# EAGLE board switchboard (EAGLE 6.4)
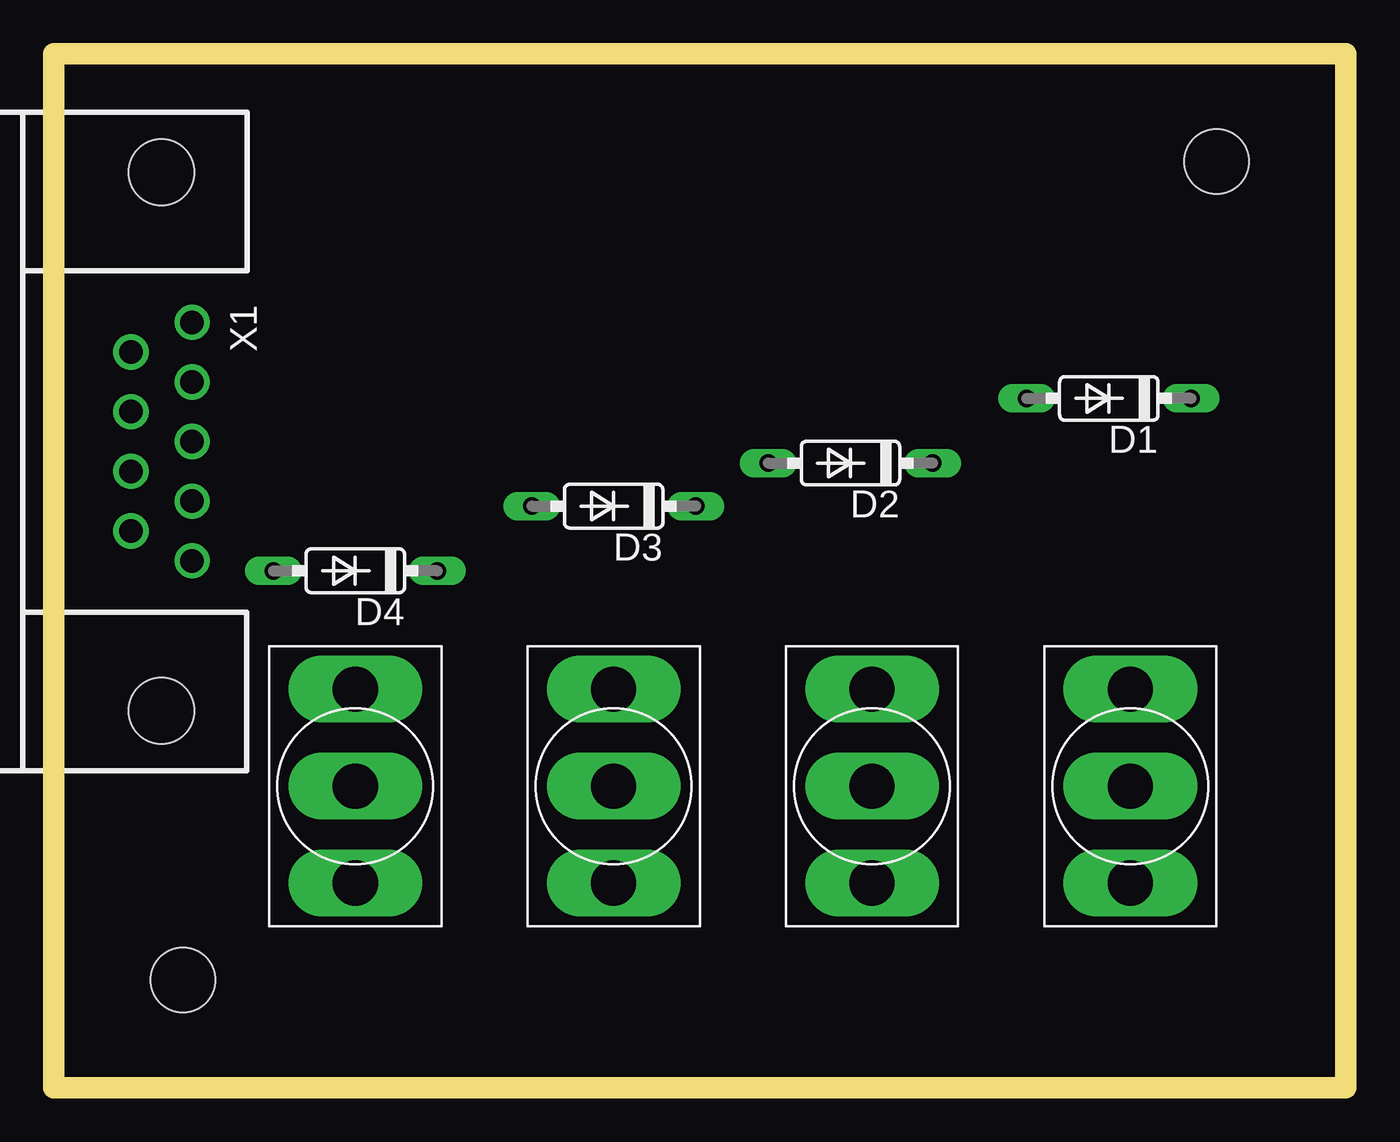
[diagram p0: board, top side]
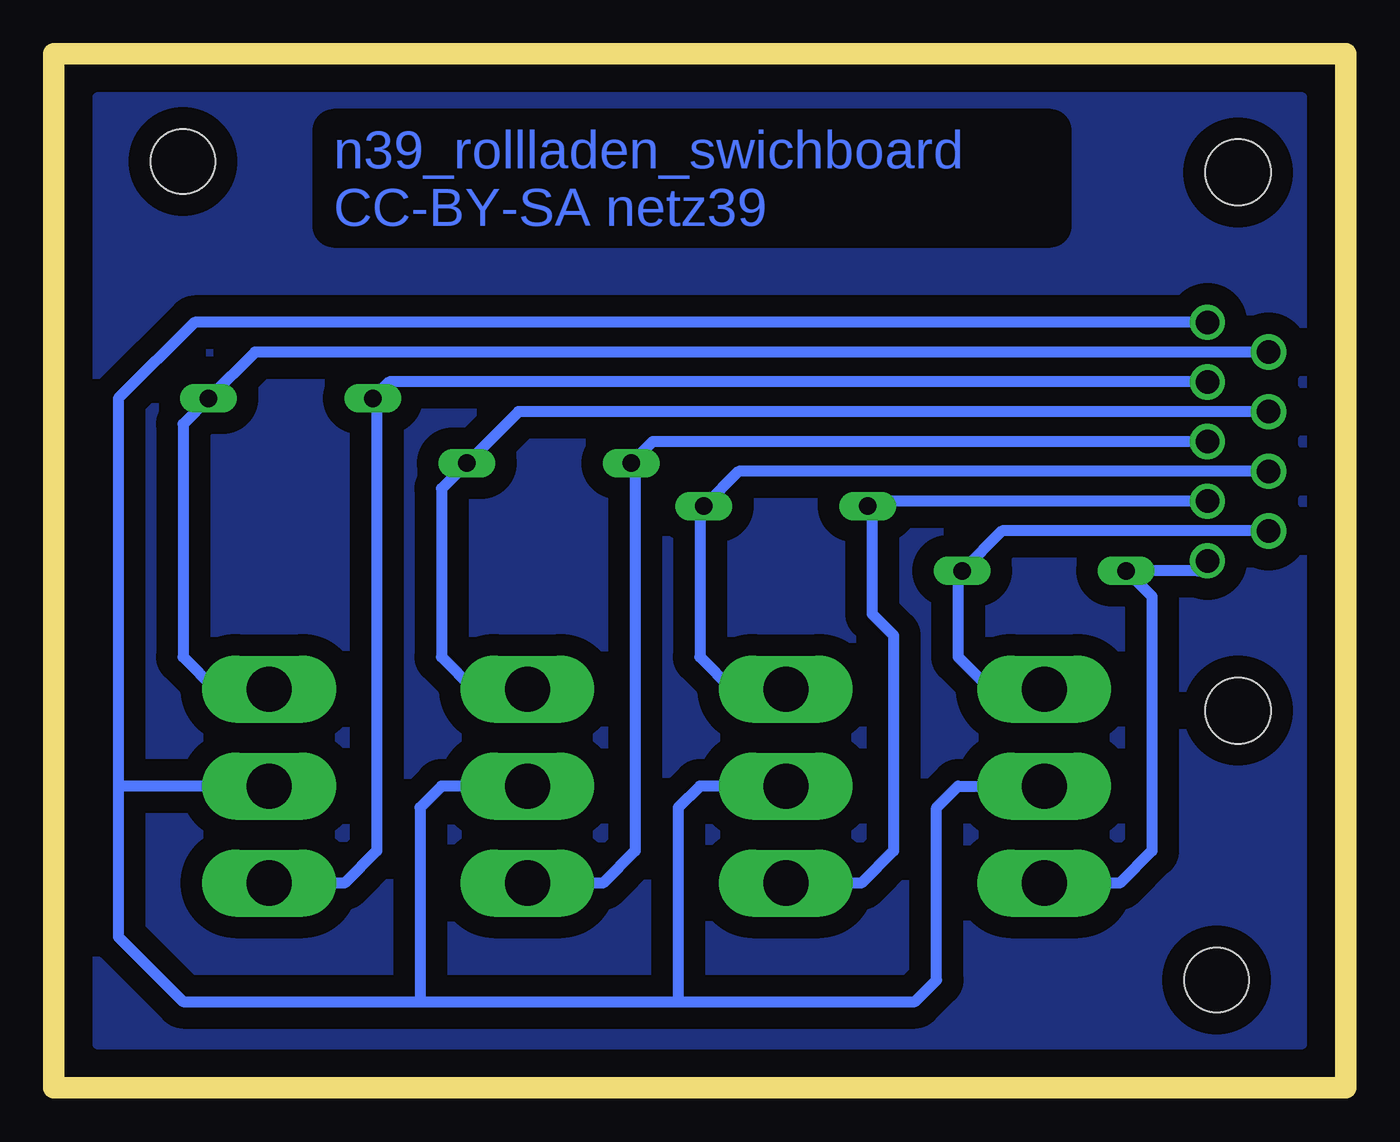
[diagram p1: board, bottom side, seen from below]

Size 60 x 48 mm. Coordinates in mm from the lower left corner, seen from the top.
Outline: 0,0 60,0 60,48 0,48 0,0
Copper layers (1*16): Top 0.035mm / dielectric 1.5mm / Bottom 0.035mm
Design rules "default": minimum track width 10mil, minimum drill 24mil, track to track 8mil, track to pad 8mil, pad to pad 8mil, via to via 8mil, smd to smd 8mil, copper to edge 40mil, drill to drill 8mil, minimum pad ring 10mil, minimum via ring 8mil, stop-mask expansion 4mil, vias tented up to drill 0mil, thermal gap 10mil
Holes 3 mm at 6,5 54,43

## Footprints (pad centres in the part's own frame; a part is rotated, then mirrored left to right if it is on the bottom)
DO35-7 = drill 0.813 long: A 3.81,0; C -3.81,0
MS500E = drill 2.1 long: P$IN 0,0; P$OUT1 0,4.5; P$OUT2 0,-4.5
H3M09RA = drill 1.092: 1 -5.537,1.422; 2 -2.769,1.422; 3 0,1.422; 4 2.769,1.422; 5 5.537,1.422; 6 -4.153,-1.422; 7 -1.384,-1.422; 8 1.384,-1.422; 9 4.153,-1.422 | hole 3.048: -12.497,0; 12.497,0

## Placement (x,y rotation side)
D1  1N4148DO35-7  [DO35-7]  49,32 180 top
D2  1N4148DO35-7  [DO35-7]  37,29 180 top
D3  1N4148DO35-7  [DO35-7]  26,27 180 top
D4  1N4148DO35-7  [DO35-7]  14,24 180 top
U$1  MS500E  [MS500E]  50,14 180 top
U$2  MS500E  [MS500E]  38,14 180 top
U$3  MS500E  [MS500E]  26,14 180 top
U$4  MS500E  [MS500E]  14,14 180 top
X1  D-SUB9-H3M09RA  [H3M09RA]  5,30 270 top

## Library data of the parts
D1-D4 = diode
U$1-U$4 = n39
X1 = con-thomas-betts; OC_FARNELL: unknown; OC_NEWARK: unknown

## Nets
N$2: D1.A U$1.P$OUT1 X1.2
N$3: D1.C U$1.P$OUT2 X1.6
N$4: D2.A U$2.P$OUT1 X1.3
N$5: D2.C U$2.P$OUT2 X1.7
N$6: D3.A U$3.P$OUT1 X1.4
N$7: D3.C U$3.P$OUT2 X1.8
N$8: D4.A U$4.P$OUT1 X1.5
N$9: D4.C U$4.P$OUT2 X1.9
VCC: U$1.P$IN U$2.P$IN U$3.P$IN U$4.P$IN X1.1

## Tracks (layer width: path | path; a pad name or v marks a point on that pad's centre or on a via)
GND
  pour Bottom (isolate 1): 2,46 58,46 58,4 58,2 2,2
N$2
  Bottom 0.5: U$1.P$OUT1 46.5,9.5 45,11 45,31.81 D1.A 44.42,32.77 X1.2
N$3
  Bottom 0.5: U$1.P$OUT2 52.5,18.5 54,20 54,30.81 D1.C 50.66,34.15 X1.6
N$4
  Bottom 0.5: U$2.P$OUT1 34.5,9.5 33,11 33,28.81 D2.A 32.19,30 X1.3
N$5
  Bottom 0.5: U$2.P$OUT2 40.5,18.5 42,20 42,27.81 D2.C 38.43,31.38 X1.7
N$6
  Bottom 0.5: U$3.P$OUT1 22.5,9.5 21,11 21,21 22,22 22,26.81 D3.A 21.96,27.23 X1.4
N$7
  Bottom 0.5: U$3.P$OUT2 28.5,18.5 30,20 30,26.81 D3.C 28.19,28.62 X1.8
N$8
  Bottom 0.5: U$4.P$OUT1 10.5,9.5 9,11 9,22.81 D4.A 6.88,24 X1.5
N$9
  Bottom 0.5: U$4.P$OUT2 16.5,18.5 18,20 18,23.81 D4.C 15.96,25.85 X1.9
VCC
  Bottom 0.5: X1.1 53.46,35.54 57,32 57,14 | 57,14 57,7 54,4 43,4 | 43,4 31,4 | 31,4 20,4 19,5 19,13 18,14 U$4.P$IN | U$3.P$IN 30,14 31,13 31,4 | U$2.P$IN 42,14 43,13 43,4 | U$1.P$IN 57,14

## Text on the board
Bottom: n39_rollladen_swichboard / CC-BY-SA netz39